# EAGLE board IOB-Outputs_array (EAGLE 7.7.0)
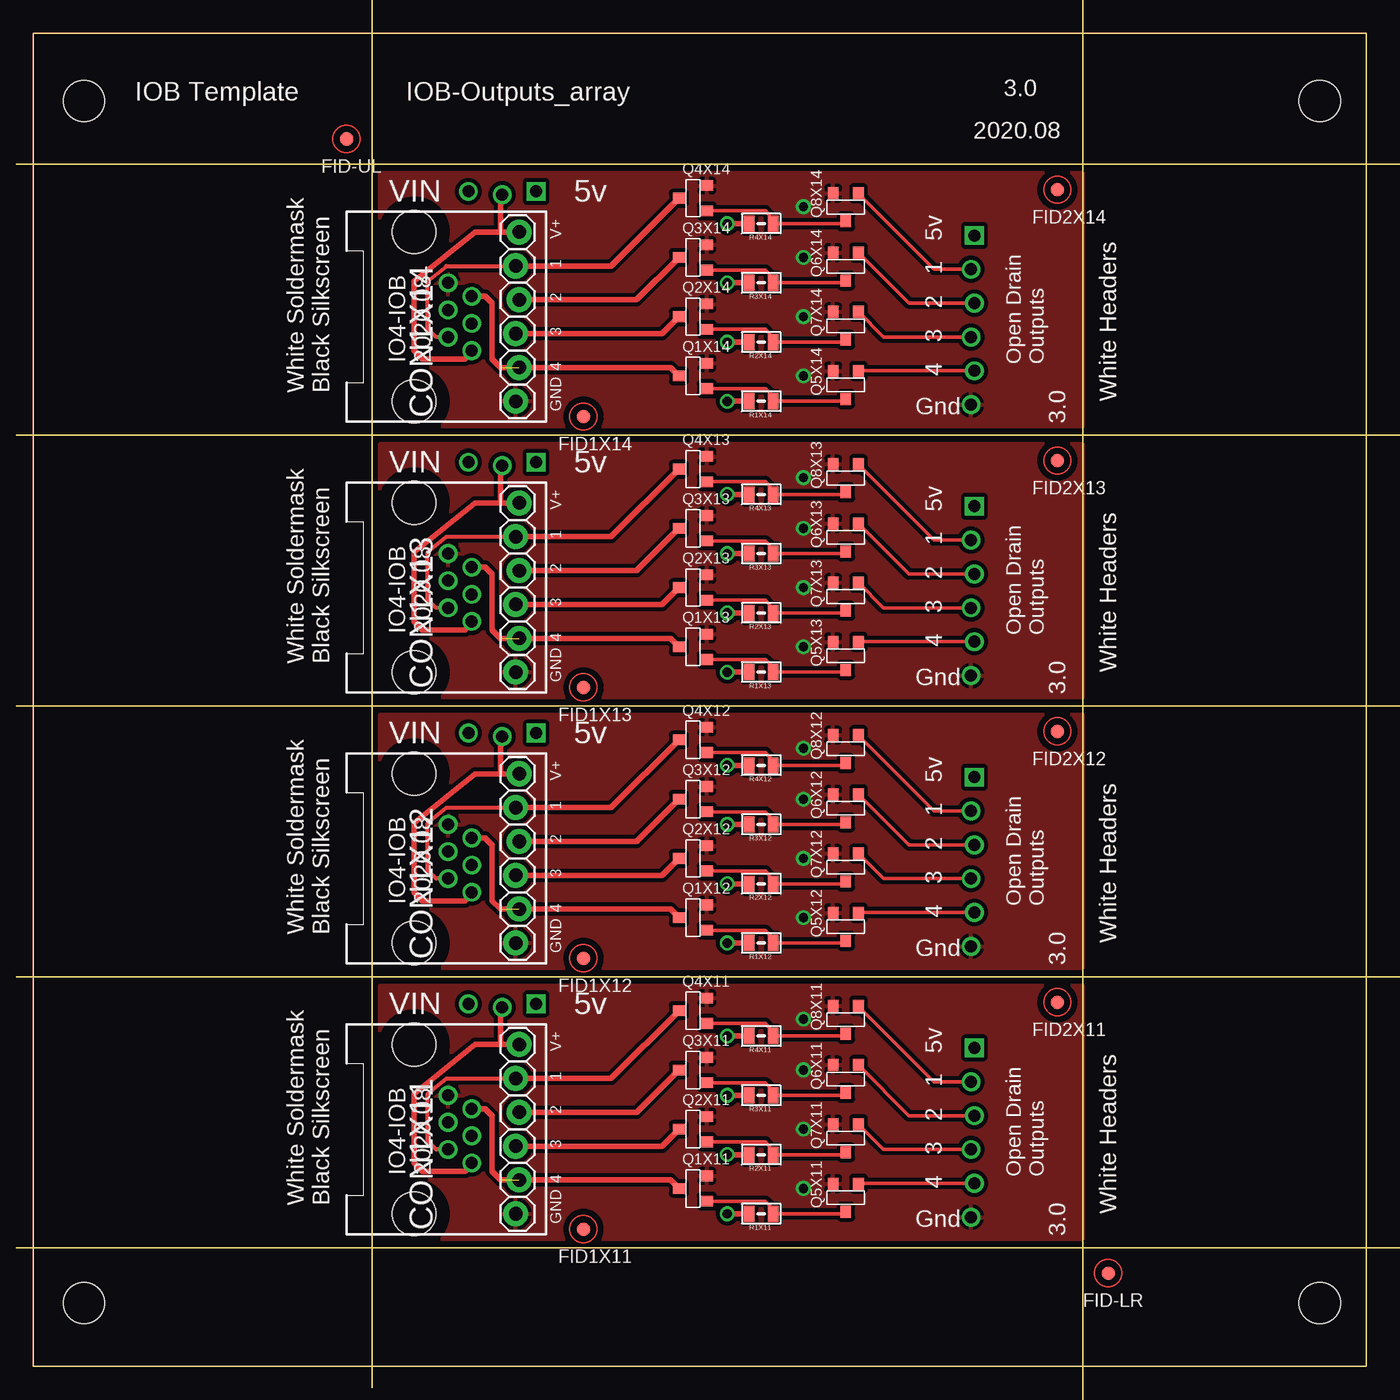
[diagram p0: board, top side]
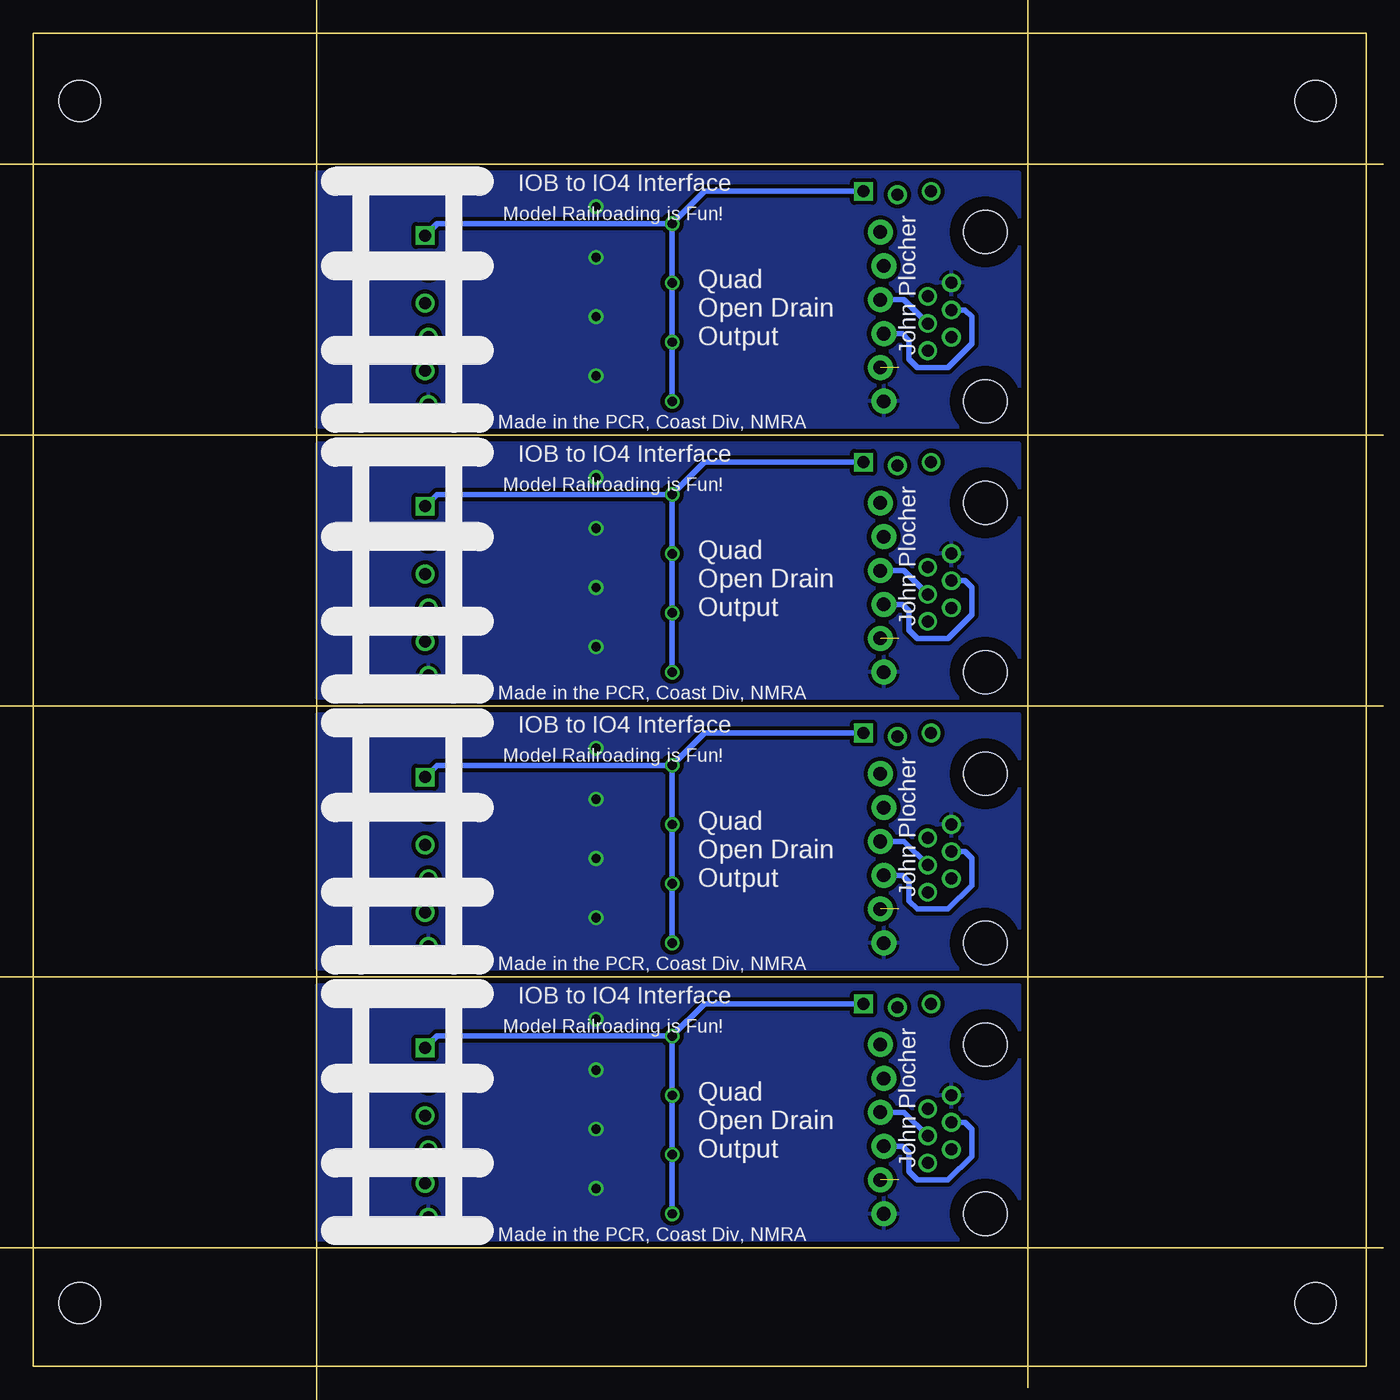
[diagram p1: board, bottom side, seen from below]

Size 100 x 100 mm. Coordinates in mm from the lower left corner, seen from the top.
Copper layers (1*16): Top 0.035mm / dielectric 1.5mm / Bottom 0.035mm
Design rules "default": minimum track width 10mil, minimum drill 0.6mm, track to track 8mil, track to pad 8mil, pad to pad 8mil, via to via 8mil, smd to smd 8mil, copper to edge 40mil, drill to drill 8mil, minimum pad ring 10mil, minimum via ring 8mil, stop-mask expansion 4mil, vias tented up to drill 0mil, thermal gap 10mil
Milling: 5 lines

## Footprints (pad centres in the part's own frame; a part is rotated, then mirrored left to right if it is on the bottom)
RJ24-INVERTED-PINS = drill 1.016 pad 1.88: 1 6.35,-4.064; 2 3.81,-3.81; 3 1.27,-4.064; 4 -1.27,-3.81; 5 -3.81,-4.064; 6 -6.35,-3.81 | drill 0.9 pad 1.4: 1@1 -2.54,-0.508; 2@1 -1.524,1.27; 3@1 -0.508,-0.508; 4@1 0.508,1.27; 5@1 1.524,-0.508; 6@1 2.54,1.27 | hole 3.251: 6.35,3.81; -6.35,3.81
FIDUCIAL_1MM = smd 1 x 1: 1 0,0
SOT23-3 = smd 0.9 x 0.8: 1 1,-0.95; 2 1,0.95; 3 -1.1,0
0805-RES = smd 0.8 x 1.2: 1 -0.9,0; 2 0.9,0
BOARD-DINRAIL-3.17IN-H4X-IOB = hole 3.1: 96.52,94.92; 96.52,4.75; 3.81,94.92; 3.81,4.75
IO4-IOB = drill 0.9: G@3 44.958,2.286; P1 44.958,12.446; P2 45.212,9.906; P3 44.958,7.366; P4 45.212,4.826; V+ 7.239,18.288; VOUT 9.779,18.034 | drill 0.9 square: V5 12.319,18.288; V5@1 45.212,14.986

## Placement (x,y rotation side)
CON1X11  [RJ24-INVERTED-PINS]  32.38,17.78 90 top
CON1X12  [RJ24-INVERTED-PINS]  32.38,38.1 90 top
CON1X13  [RJ24-INVERTED-PINS]  32.38,58.42 90 top
CON1X14  [RJ24-INVERTED-PINS]  32.38,78.74 90 top
FID1X11  FIDUCIAL  [FIDUCIAL_1MM]  41.27,10.29 0 top
FID1X12  FIDUCIAL  [FIDUCIAL_1MM]  41.27,30.61 0 top
FID1X13  FIDUCIAL  [FIDUCIAL_1MM]  41.27,50.93 0 top
FID1X14  FIDUCIAL  [FIDUCIAL_1MM]  41.27,71.25 0 top
FID2X11  FIDUCIAL  [FIDUCIAL_1MM]  76.83,27.3 0 top
FID2X12  FIDUCIAL  [FIDUCIAL_1MM]  76.83,47.62 0 top
FID2X13  FIDUCIAL  [FIDUCIAL_1MM]  76.83,67.94 0 top
FID2X14  FIDUCIAL  [FIDUCIAL_1MM]  76.83,88.27 0 top
FID-LR  FIDUCIAL  [FIDUCIAL_1MM]  80.64,6.99 0 top
FID-UL  FIDUCIAL  [FIDUCIAL_1MM]  23.5,92.08 0 top
Q1X11  MOSFET-N  [SOT23-3]  49.53,13.34 0 top
Q1X12  MOSFET-N  [SOT23-3]  49.53,33.66 0 top
Q1X13  MOSFET-N  [SOT23-3]  49.53,53.98 0 top
Q1X14  MOSFET-N  [SOT23-3]  49.53,74.3 0 top
Q2X11  MOSFET-N  [SOT23-3]  49.53,17.78 0 top
Q2X12  MOSFET-N  [SOT23-3]  49.53,38.1 0 top
Q2X13  MOSFET-N  [SOT23-3]  49.53,58.42 0 top
Q2X14  MOSFET-N  [SOT23-3]  49.53,78.74 0 top
Q3X11  MOSFET-N  [SOT23-3]  49.53,22.23 0 top
Q3X12  MOSFET-N  [SOT23-3]  49.53,42.55 0 top
Q3X13  MOSFET-N  [SOT23-3]  49.53,62.87 0 top
Q3X14  MOSFET-N  [SOT23-3]  49.53,83.19 0 top
Q4X11  MOSFET-N  [SOT23-3]  49.53,26.67 0 top
Q4X12  MOSFET-N  [SOT23-3]  49.53,46.99 0 top
Q4X13  MOSFET-N  [SOT23-3]  49.53,67.31 0 top
Q4X14  MOSFET-N  [SOT23-3]  49.53,87.63 0 top
Q5X11  MOSFET-N  [SOT23-3]  60.96,12.7 90 top
Q5X12  MOSFET-N  [SOT23-3]  60.96,33.02 90 top
Q5X13  MOSFET-N  [SOT23-3]  60.96,53.34 90 top
Q5X14  MOSFET-N  [SOT23-3]  60.96,73.66 90 top
Q6X11  MOSFET-N  [SOT23-3]  60.96,21.59 90 top
Q6X12  MOSFET-N  [SOT23-3]  60.96,41.91 90 top
Q6X13  MOSFET-N  [SOT23-3]  60.96,62.23 90 top
Q6X14  MOSFET-N  [SOT23-3]  60.96,82.55 90 top
Q7X11  MOSFET-N  [SOT23-3]  60.96,17.14 90 top
Q7X12  MOSFET-N  [SOT23-3]  60.96,37.47 90 top
Q7X13  MOSFET-N  [SOT23-3]  60.96,57.78 90 top
Q7X14  MOSFET-N  [SOT23-3]  60.96,78.11 90 top
Q8X11  MOSFET-N  [SOT23-3]  60.96,26.04 90 top
Q8X12  MOSFET-N  [SOT23-3]  60.96,46.35 90 top
Q8X13  MOSFET-N  [SOT23-3]  60.96,66.67 90 top
Q8X14  MOSFET-N  [SOT23-3]  60.96,87 90 top
R1X11  10k  [0805-RES]  54.61,11.43 180 top
R1X12  10k  [0805-RES]  54.61,31.75 180 top
R1X13  10k  [0805-RES]  54.61,52.07 180 top
R1X14  10k  [0805-RES]  54.61,72.39 180 top
R2X11  10k  [0805-RES]  54.61,15.88 180 top
R2X12  10k  [0805-RES]  54.61,36.2 180 top
R2X13  10k  [0805-RES]  54.61,56.52 180 top
R2X14  10k  [0805-RES]  54.61,76.83 180 top
R3X11  10k  [0805-RES]  54.61,20.32 180 top
R3X12  10k  [0805-RES]  54.61,40.64 180 top
R3X13  10k  [0805-RES]  54.61,60.96 180 top
R3X14  10k  [0805-RES]  54.61,81.28 180 top
R4X11  10k  [0805-RES]  54.61,24.77 180 top
R4X12  10k  [0805-RES]  54.61,45.09 180 top
R4X13  10k  [0805-RES]  54.61,65.41 180 top
R4X14  10k  [0805-RES]  54.61,85.72 180 top
R8X1  [BOARD-DINRAIL-3.17IN-H4X-IOB]  0,0 0 top
U$1X11  CONNECTOR-IO4-IOBFULL  [IO4-IOB]  25.4,8.89 0 top
U$1X12  CONNECTOR-IO4-IOBFULL  [IO4-IOB]  25.4,29.21 0 top
U$1X13  CONNECTOR-IO4-IOBFULL  [IO4-IOB]  25.4,49.53 0 top
U$1X14  CONNECTOR-IO4-IOBFULL  [IO4-IOB]  25.4,69.85 0 top

## Library data of the parts
CON1X11-CON1X14 FID1X11-FID1X14 FID2X11-FID2X14 FID-LR FID-UL Q1X11-Q1X14 Q2X11-Q2X14 Q3X11-Q3X14 Q4X11-Q4X14 Q5X11-Q5X14 Q6X11-Q6X14 Q7X11-Q7X14 Q8X11-Q8X14 R1X11-R1X14 R2X11-R2X14 R3X11-R3X14 R4X11-R4X14 R8X1 U$1X11-U$1X14 = SPCoast

## Nets
GNDX11: CON1X11.6 CON1X11.6@1 Q1X11.2 Q2X11.2 Q3X11.2 Q4X11.2 Q5X11.2 Q6X11.2 Q7X11.2 Q8X11.2 U$1X11.G@3
GNDX12: CON1X12.6 CON1X12.6@1 Q1X12.2 Q2X12.2 Q3X12.2 Q4X12.2 Q5X12.2 Q6X12.2 Q7X12.2 Q8X12.2 U$1X12.G@3
GNDX13: CON1X13.6 CON1X13.6@1 Q1X13.2 Q2X13.2 Q3X13.2 Q4X13.2 Q5X13.2 Q6X13.2 Q7X13.2 Q8X13.2 U$1X13.G@3
GNDX14: CON1X14.6 CON1X14.6@1 Q1X14.2 Q2X14.2 Q3X14.2 Q4X14.2 Q5X14.2 Q6X14.2 Q7X14.2 Q8X14.2 U$1X14.G@3
IO1X11: CON1X11.2 CON1X11.2@1 Q4X11.3
IO1X12: CON1X12.2 CON1X12.2@1 Q4X12.3
IO1X13: CON1X13.2 CON1X13.2@1 Q4X13.3
IO1X14: CON1X14.2 CON1X14.2@1 Q4X14.3
IO2X11: CON1X11.3 CON1X11.3@1 Q3X11.3
IO2X12: CON1X12.3 CON1X12.3@1 Q3X12.3
IO2X13: CON1X13.3 CON1X13.3@1 Q3X13.3
IO2X14: CON1X14.3 CON1X14.3@1 Q3X14.3
IO3X11: CON1X11.4 CON1X11.4@1 Q2X11.3
IO3X12: CON1X12.4 CON1X12.4@1 Q2X12.3
IO3X13: CON1X13.4 CON1X13.4@1 Q2X13.3
IO3X14: CON1X14.4 CON1X14.4@1 Q2X14.3
IO4X11: CON1X11.5 CON1X11.5@1 Q1X11.3
IO4X12: CON1X12.5 CON1X12.5@1 Q1X12.3
IO4X13: CON1X13.5 CON1X13.5@1 Q1X13.3
IO4X14: CON1X14.5 CON1X14.5@1 Q1X14.3
N$1X11: Q4X11.1 Q8X11.3 R4X11.1
N$1X12: Q4X12.1 Q8X12.3 R4X12.1
N$1X13: Q4X13.1 Q8X13.3 R4X13.1
N$1X14: Q4X14.1 Q8X14.3 R4X14.1
N$6X11: Q3X11.1 Q6X11.3 R3X11.1
N$6X12: Q3X12.1 Q6X12.3 R3X12.1
N$6X13: Q3X13.1 Q6X13.3 R3X13.1
N$6X14: Q3X14.1 Q6X14.3 R3X14.1
N$7X11: Q2X11.1 Q7X11.3 R2X11.1
N$7X12: Q2X12.1 Q7X12.3 R2X12.1
N$7X13: Q2X13.1 Q7X13.3 R2X13.1
N$7X14: Q2X14.1 Q7X14.3 R2X14.1
N$8X11: Q1X11.1 Q5X11.3 R1X11.1
N$8X12: Q1X12.1 Q5X12.3 R1X12.1
N$8X13: Q1X13.1 Q5X13.3 R1X13.1
N$8X14: Q1X14.1 Q5X14.3 R1X14.1
P1X11: Q8X11.1 U$1X11.P1
P1X12: Q8X12.1 U$1X12.P1
P1X13: Q8X13.1 U$1X13.P1
P1X14: Q8X14.1 U$1X14.P1
P2X11: Q6X11.1 U$1X11.P2
P2X12: Q6X12.1 U$1X12.P2
P2X13: Q6X13.1 U$1X13.P2
P2X14: Q6X14.1 U$1X14.P2
P3X11: Q7X11.1 U$1X11.P3
P3X12: Q7X12.1 U$1X12.P3
P3X13: Q7X13.1 U$1X13.P3
P3X14: Q7X14.1 U$1X14.P3
P4X11: Q5X11.1 U$1X11.P4
P4X12: Q5X12.1 U$1X12.P4
P4X13: Q5X13.1 U$1X13.P4
P4X14: Q5X14.1 U$1X14.P4
VCCX11: R1X11.2 R2X11.2 R3X11.2 R4X11.2 U$1X11.V5 U$1X11.V5@1
VCCX12: R1X12.2 R2X12.2 R3X12.2 R4X12.2 U$1X12.V5 U$1X12.V5@1
VCCX13: R1X13.2 R2X13.2 R3X13.2 R4X13.2 U$1X13.V5 U$1X13.V5@1
VCCX14: R1X14.2 R2X14.2 R3X14.2 R4X14.2 U$1X14.V5 U$1X14.V5@1
VINX11: U$1X11.V+
VINX12: U$1X12.V+
VINX13: U$1X13.V+
VINX14: U$1X14.V+
VOUTX11: CON1X11.1 CON1X11.1@1 U$1X11.VOUT
VOUTX12: CON1X12.1 CON1X12.1@1 U$1X12.VOUT
VOUTX13: CON1X13.1 CON1X13.1@1 U$1X13.VOUT
VOUTX14: CON1X14.1 CON1X14.1@1 U$1X14.VOUT

## Tracks (layer width: path | path; a pad name or v marks a point on that pad's centre or on a via)
GNDX11  (via drill 0.7 pad 1.11)
  Top 0.406: Q3X11.2 50.48,23.18 | Q2X11.2 50.48,18.73 | Q1X11.2 50.48,14.29
  other vias: 57.78,26.04 57.78,17.78 57.78,13.34 57.78,22.23
  pour Bottom (isolate 0.305): 26.04,9.53 26.04,28.57 78.74,28.57 78.74,9.53
  pour Top (isolate 0.305): 26.04,9.53 26.04,28.57 78.74,28.57 78.74,9.53
GNDX12  (via drill 0.7 pad 1.11)
  Top 0.406: Q3X12.2 50.48,43.49 | Q2X12.2 50.48,39.05 | Q1X12.2 50.48,34.6
  other vias: 57.78,46.35 57.78,38.1 57.78,33.66 57.78,42.55
  pour Bottom (isolate 0.305): 26.04,29.84 26.04,48.9 78.74,48.9 78.74,29.84
  pour Top (isolate 0.305): 26.04,29.84 26.04,48.9 78.74,48.9 78.74,29.84
GNDX13  (via drill 0.7 pad 1.11)
  Top 0.406: Q3X13.2 50.48,63.81 | Q2X13.2 50.48,59.37 | Q1X13.2 50.48,54.92
  other vias: 57.78,66.67 57.78,58.42 57.78,53.98 57.78,62.87
  pour Bottom (isolate 0.305): 26.04,50.16 26.04,69.22 78.74,69.22 78.74,50.16
  pour Top (isolate 0.305): 26.04,50.16 26.04,69.22 78.74,69.22 78.74,50.16
GNDX14  (via drill 0.7 pad 1.11)
  Top 0.406: Q3X14.2 50.48,84.14 | Q2X14.2 50.48,79.69 | Q1X14.2 50.48,75.25
  other vias: 57.78,87 57.78,78.74 57.78,74.3 57.78,83.19
  pour Bottom (isolate 0.305): 26.04,70.48 26.04,89.53 78.74,89.53 78.74,70.48
  pour Top (isolate 0.305): 26.04,70.48 26.04,89.53 78.74,89.53 78.74,70.48
IO1X11
  Top 0.305: CON1X11.2@1 30.23,16.26 29.59,16.89 29.59,20.45 30.99,21.59 CON1X11.2
  Top 0.406: Q4X11.3 43.35,21.59 CON1X11.2
IO1X12
  Top 0.305: CON1X12.2@1 30.23,36.58 29.59,37.21 29.59,40.77 30.99,41.91 CON1X12.2
  Top 0.406: Q4X12.3 43.35,41.91 CON1X12.2
IO1X13
  Top 0.305: CON1X13.2@1 30.23,56.9 29.59,57.53 29.59,61.09 30.99,62.23 CON1X13.2
  Top 0.406: Q4X13.3 43.35,62.23 CON1X13.2
IO1X14
  Top 0.305: CON1X14.2@1 30.23,77.22 29.59,77.85 29.59,81.41 30.99,82.55 CON1X14.2
  Top 0.406: Q4X14.3 43.35,82.55 CON1X14.2
IO2X11
  Top 0.406: Q3X11.3 45.26,19.05 CON1X11.3
  Bottom 0.406: CON1X11.3@1 34.67,19.05 CON1X11.3
IO2X12
  Top 0.406: Q3X12.3 45.26,39.37 CON1X12.3
  Bottom 0.406: CON1X12.3@1 34.67,39.37 CON1X12.3
IO2X13
  Top 0.406: Q3X13.3 45.26,59.69 CON1X13.3
  Bottom 0.406: CON1X13.3@1 34.67,59.69 CON1X13.3
IO2X14
  Top 0.406: Q3X14.3 45.26,80.01 CON1X14.3
  Bottom 0.406: CON1X14.3@1 34.67,80.01 CON1X14.3
IO3X11
  Top 0.406: Q2X11.3 47.16,16.51 CON1X11.4
  Bottom 0.406: CON1X11.4@1 30.1,18.29 29.59,17.78 29.59,15.75 31.37,13.97 33.66,13.97 34.29,14.61 34.29,16 34.8,16.51 CON1X11.4
IO3X12
  Top 0.406: Q2X12.3 47.16,36.83 CON1X12.4
  Bottom 0.406: CON1X12.4@1 30.1,38.61 29.59,38.1 29.59,36.07 31.37,34.29 33.66,34.29 34.29,34.92 34.29,36.32 34.8,36.83 CON1X12.4
IO3X13
  Top 0.406: Q2X13.3 47.16,57.15 CON1X13.4
  Bottom 0.406: CON1X13.4@1 30.1,58.93 29.59,58.42 29.59,56.39 31.37,54.61 33.66,54.61 34.29,55.24 34.29,56.64 34.8,57.15 CON1X13.4
IO3X14
  Top 0.406: Q2X14.3 47.16,77.47 CON1X14.4
  Bottom 0.406: CON1X14.4@1 30.1,79.25 29.59,78.74 29.59,76.71 31.37,74.93 33.66,74.93 34.29,75.56 34.29,76.96 34.8,77.47 CON1X14.4
IO4X11  (1 unrouted)
  Top 0.406: Q1X11.3 47.8,13.97 35.05,13.97 34.42,14.61 34.42,18.8 33.91,19.3 CON1X11.5@1
IO4X12  (1 unrouted)
  Top 0.406: Q1X12.3 47.8,34.29 35.05,34.29 34.42,34.92 34.42,39.12 33.91,39.62 CON1X12.5@1
IO4X13  (1 unrouted)
  Top 0.406: Q1X13.3 47.8,54.61 35.05,54.61 34.42,55.24 34.42,59.44 33.91,59.94 CON1X13.5@1
IO4X14  (1 unrouted)
  Top 0.406: Q1X14.3 47.8,74.93 35.05,74.93 34.42,75.56 34.42,79.76 33.91,80.26 CON1X14.5@1
N$1X11
  Top 0.254: Q8X11.3 60.79,24.77 R4X11.1 55.24,25.03 55.24,25.4 54.92,25.72 Q4X11.1
N$1X12
  Top 0.254: Q8X12.3 60.79,45.09 R4X12.1 55.24,45.35 55.24,45.72 54.92,46.04 Q4X12.1
N$1X13
  Top 0.254: Q8X13.3 60.79,65.41 R4X13.1 55.24,65.67 55.24,66.04 54.92,66.36 Q4X13.1
N$1X14
  Top 0.254: Q8X14.3 60.79,85.72 R4X14.1 55.24,85.99 55.24,86.36 54.92,86.68 Q4X14.1
N$6X11
  Top 0.254: Q6X11.3 60.79,20.32 R3X11.1 55.24,20.59 55.24,20.95 54.92,21.27 Q3X11.1
N$6X12
  Top 0.254: Q6X12.3 60.79,40.64 R3X12.1 55.24,40.91 55.24,41.27 54.92,41.59 Q3X12.1
N$6X13
  Top 0.254: Q6X13.3 60.79,60.96 R3X13.1 55.24,61.23 55.24,61.59 54.92,61.91 Q3X13.1
N$6X14
  Top 0.254: Q6X14.3 60.79,81.28 R3X14.1 55.24,81.55 55.24,81.92 54.92,82.23 Q3X14.1
N$7X11
  Top 0.254: Q7X11.3 60.79,15.88 R2X11.1 55.24,16.14 55.24,16.51 54.92,16.83 Q2X11.1
N$7X12
  Top 0.254: Q7X12.3 60.79,36.2 R2X12.1 55.24,36.46 55.24,36.83 54.92,37.15 Q2X12.1
N$7X13
  Top 0.254: Q7X13.3 60.79,56.52 R2X13.1 55.24,56.78 55.24,57.15 54.92,57.47 Q2X13.1
N$7X14
  Top 0.254: Q7X14.3 60.79,76.83 R2X14.1 55.24,77.1 55.24,77.47 54.92,77.79 Q2X14.1
N$8X11
  Top 0.254: 55.88,11.43 60.79,11.43 Q5X11.3 | Q1X11.1 54.92,12.38 55.88,11.43 | 55.88,11.43 R1X11.1
N$8X12
  Top 0.254: 55.88,31.75 60.79,31.75 Q5X12.3 | Q1X12.1 54.92,32.7 55.88,31.75 | 55.88,31.75 R1X12.1
N$8X13
  Top 0.254: 55.88,52.07 60.79,52.07 Q5X13.3 | Q1X13.1 54.92,53.02 55.88,52.07 | 55.88,52.07 R1X13.1
N$8X14
  Top 0.254: 55.88,72.39 60.79,72.39 Q5X14.3 | Q1X14.1 54.92,73.34 55.88,72.39 | 55.88,72.39 R1X14.1
P1X11
  Top 0.254: Q8X11.1 61.91,26.99 67.56,21.34 U$1X11.P1
P1X12
  Top 0.254: Q8X12.1 61.91,47.31 67.56,41.66 U$1X12.P1
P1X13
  Top 0.254: Q8X13.1 61.91,67.63 67.56,61.98 U$1X13.P1
P1X14
  Top 0.254: Q8X14.1 61.91,87.95 67.56,82.3 U$1X14.P1
P2X11
  Top 0.254: Q6X11.1 65.7,18.8 U$1X11.P2
P2X12
  Top 0.254: Q6X12.1 65.7,39.12 U$1X12.P2
P2X13
  Top 0.254: Q6X13.1 65.7,59.44 U$1X13.P2
P2X14
  Top 0.254: Q6X14.1 65.7,79.76 U$1X14.P2
P3X11
  Top 0.254: Q7X11.1 63.8,16.26 U$1X11.P3
P3X12
  Top 0.254: Q7X12.1 63.8,36.58 U$1X12.P3
P3X13
  Top 0.254: Q7X13.1 63.8,56.9 U$1X13.P3
P3X14
  Top 0.254: Q7X14.1 63.8,77.22 U$1X14.P3
P4X11
  Top 0.254: Q5X11.1 61.93,13.72 U$1X11.P4
P4X12
  Top 0.254: Q5X12.1 61.93,34.04 U$1X12.P4
P4X13
  Top 0.254: Q5X13.1 61.93,54.36 U$1X13.P4
P4X14
  Top 0.254: Q5X14.1 61.93,74.68 U$1X14.P4
VCCX11  (via drill 0.7 pad 1.11)
  Top 0.406: R4X11.2 v52.07,24.77 | R3X11.2 v52.07,20.32 | R2X11.2 v52.07,15.88 | R1X11.2 v52.07,11.43
  Bottom 0.406: v52.07,24.77 v52.07,20.32 v52.07,15.88 v52.07,11.43 | U$1X11.V5 49.66,27.18 v52.07,24.77 | U$1X11.V5@1 69.72,24.77 v52.07,24.77
VCCX12  (via drill 0.7 pad 1.11)
  Top 0.406: R4X12.2 v52.07,45.09 | R3X12.2 v52.07,40.64 | R2X12.2 v52.07,36.2 | R1X12.2 v52.07,31.75
  Bottom 0.406: v52.07,45.09 v52.07,40.64 v52.07,36.2 v52.07,31.75 | U$1X12.V5 49.66,47.5 v52.07,45.09 | U$1X12.V5@1 69.72,45.09 v52.07,45.09
VCCX13  (via drill 0.7 pad 1.11)
  Top 0.406: R4X13.2 v52.07,65.41 | R3X13.2 v52.07,60.96 | R2X13.2 v52.07,56.52 | R1X13.2 v52.07,52.07
  Bottom 0.406: v52.07,65.41 v52.07,60.96 v52.07,56.52 v52.07,52.07 | U$1X13.V5 49.66,67.82 v52.07,65.41 | U$1X13.V5@1 69.72,65.41 v52.07,65.41
VCCX14  (via drill 0.7 pad 1.11)
  Top 0.406: R4X14.2 v52.07,85.72 | R3X14.2 v52.07,81.28 | R2X14.2 v52.07,76.83 | R1X14.2 v52.07,72.39
  Bottom 0.406: v52.07,85.72 v52.07,81.28 v52.07,76.83 v52.07,72.39 | U$1X14.V5 49.66,88.14 v52.07,85.72 | U$1X14.V5@1 69.72,85.72 v52.07,85.72
VOUTX11
  Top 0.406: CON1X11.1@1 32.89,15.11 32.38,14.61 29.21,14.61 28.57,15.24 28.57,20.45 33.15,24.13 35.05,24.13 | 35.05,24.13 CON1X11.1 | U$1X11.VOUT 35.05,26.8 35.05,24.13
VOUTX12
  Top 0.406: CON1X12.1@1 32.89,35.43 32.38,34.92 29.21,34.92 28.57,35.56 28.57,40.77 33.15,44.45 35.05,44.45 | 35.05,44.45 CON1X12.1 | U$1X12.VOUT 35.05,47.12 35.05,44.45
VOUTX13
  Top 0.406: CON1X13.1@1 32.89,55.75 32.38,55.24 29.21,55.24 28.57,55.88 28.57,61.09 33.15,64.77 35.05,64.77 | 35.05,64.77 CON1X13.1 | U$1X13.VOUT 35.05,67.44 35.05,64.77
VOUTX14
  Top 0.406: CON1X14.1@1 32.89,76.07 32.38,75.56 29.21,75.56 28.57,76.2 28.57,81.41 33.15,85.09 35.05,85.09 | 35.05,85.09 CON1X14.1 | U$1X14.VOUT 35.05,87.76 35.05,85.09

## Text on the board
tPlace: 3.0 | 2020.08 | IO4-IOB | 2020.08 | Open Drain / Outputs | White Soldermask / Black Silkscreen | White Headers | 3.0 | IO4-IOB | 2020.08 | Open Drain / Outputs | White Soldermask / Black Silkscreen | White Headers | 3.0 | IO4-IOB | 2020.08 | Open Drain / Outputs | White Soldermask / Black Silkscreen | White Headers | 3.0 | IO4-IOB | 2020.08 | Open Drain / Outputs | White Soldermask / Black Silkscreen | White Headers | 3.0
bPlace: John Plocher | Quad / Open Drain / Output | John Plocher | Quad / Open Drain / Output | John Plocher | Quad / Open Drain / Output | John Plocher | Quad / Open Drain / Output
_tNames: Q4 | R4 | Q8 | FID2 | Q3 | R3 | Q6 | Q7 | Q2 | R2 | CON1 | Q5 | Q1 | R1 | FID1 | Q4 | R4 | Q8 | FID2 | Q3 | Q6 | R3 | Q7 | Q2 | R2 | CON1 | Q1 | R1 | Q5 | FID1 | Q4 | Q8 | R4 | FID2 | Q6 | Q3 | R3 | Q2 | R2 | Q7 | CON1 | Q5 | Q1 | R1 | FID1 | Q4 | R4 | Q8 | FID2 | Q3 | R3 | Q6 | Q2 | Q7 | R2 | CON1 | Q5 | Q1 | R1 | FID1